# EAGLE board Final Thesis (EAGLE 7.5.0)
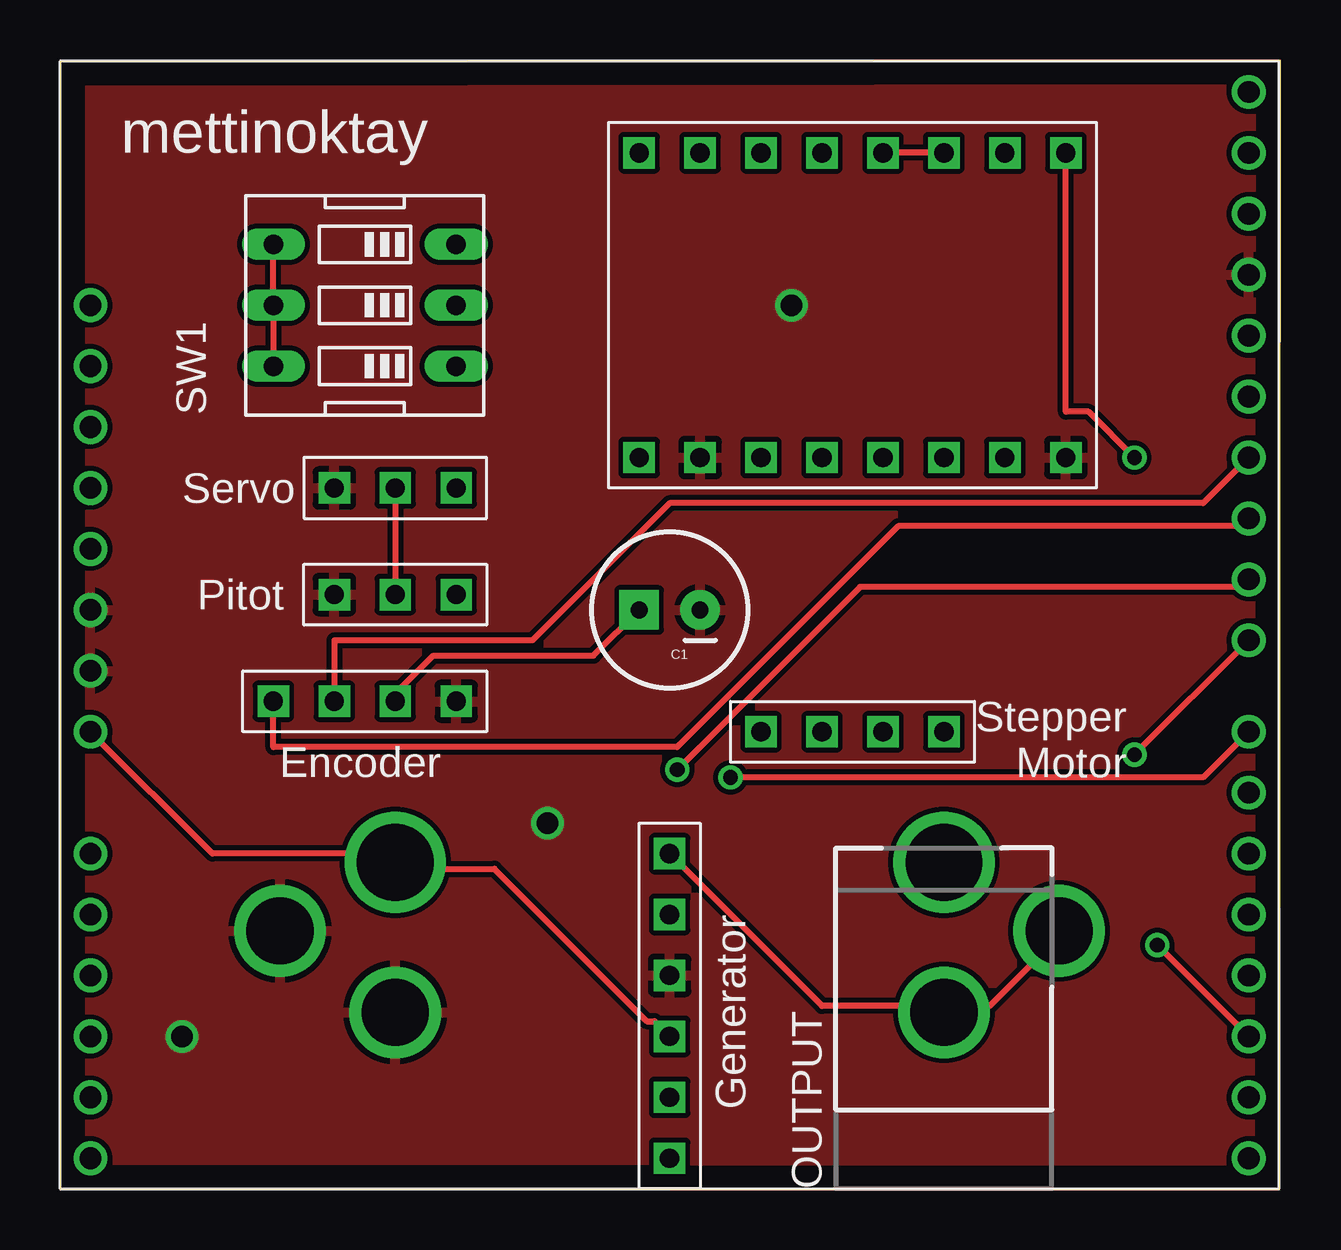
[diagram p0: board, top side]
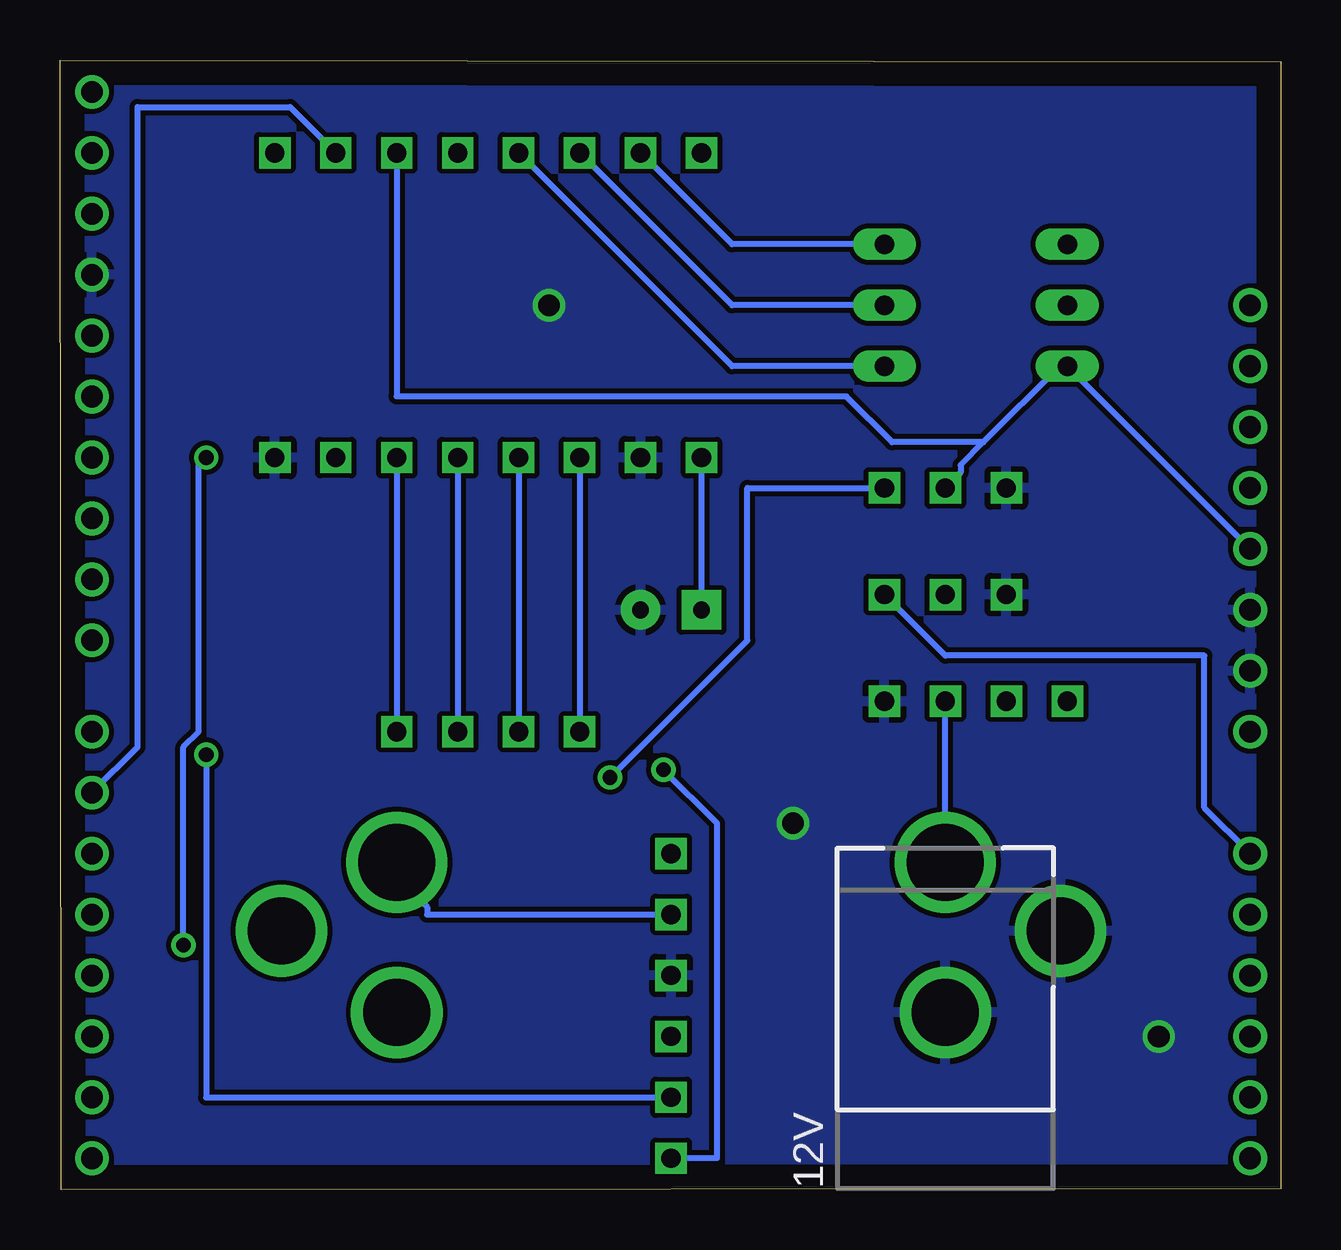
[diagram p1: board, bottom side, seen from below]

Size 50.86 x 47.09 mm. Coordinates in mm from the lower left corner, seen from the top.
Outline: 0,0.04 50.81,0 50.86,47.09 0,47.02 0,0.04
Copper layers (1*16): Top 0.035mm / dielectric 1.5mm / Bottom 0.035mm
Design rules "default": minimum track width 10mil, minimum drill 24mil, track to track 8mil, track to pad 8mil, pad to pad 8mil, via to via 8mil, smd to smd 8mil, copper to edge 40mil, drill to drill 8mil, minimum pad ring 10mil, minimum via ring 8mil, stop-mask expansion 4mil, vias tented up to drill 0mil, thermal gap 10mil

## Footprints (pad centres in the part's own frame; a part is rotated, then mirrored left to right if it is on the bottom)
DCJACK_2MM_PTH = drill 2.8: GND 0,7.35; GNDBREAK 4.8,10.75 | drill 3.2: PWR 0,13.6
CPOL-RADIAL-100UF-25V = drill 0.7 pad 1.651 square: 1 1.27,0 | drill 0.7 pad 1.651: 2 -1.27,0
ARCH_PRO = drill 0.9: 3V3 -17.78,17.78; 5V -17.78,15.24; GND1 -17.78,12.7; GND2 -17.78,10.16; GND3 30.48,26.67; IOREF -17.78,22.86; P0_0_SDA1_TXD3 30.48,11.43; P0_1_SCL1_RXD3 30.48,13.97; P0_4 30.48,-5.08; P0_5 30.48,-2.54; P0_6_SSEL 30.48,16.51; P0_7_SCK 30.48,24.13; P0_8_MISO 30.48,21.59; P0_9_MOSI 30.48,19.05; P0_23 -17.78,2.54; P0_24 -17.78,0; P0_25_TXD3 -17.78,-2.54; P0_26_RXD3 -17.78,-5.08; P0_27_SDA0 30.48,31.75; P0_28_SCL0 30.48,34.29; P1_30 -17.78,-7.62; P1_31 -17.78,-10.16; P2_12 -17.78,25.4; P2_13 30.48,29.21; P4_28_TXD3 30.48,-7.62; P4_29_RXD3 30.48,-10.16; RST -17.78,20.32; VIN -17.78,7.62; ~P2_2 30.48,0; ~P2_3 30.48,2.54; ~P2_4 30.48,5.08; ~P2_5 30.48,7.62
EDG-03 = drill 0.813 long: 1 -2.54,-3.81; 2 0,-3.81; 3 2.54,-3.81; 4 2.54,3.81; 5 0,3.81; 6 -2.54,3.81
ENCODER = drill 0.8 square: A 0,3.81; B 0,1.27; GND 0,-3.81; VCC 0,-1.27
GENERATOR = drill 0.8 square: + 0,-3.81; - 0,-6.35; A 0,6.35; B 0,3.81; GND 0,-1.27; VCC 0,1.27
PITOT = drill 0.8 square: 5V 0,-1.27; GND 0,-3.81; SGN 0,1.27
SERVO = drill 0.8 square: 5V 0,-1.27; GND 0,-3.81; SGN 0,1.27
STEPPER = drill 0.8 square: A 0,3.81; B 0,1.27; C 0,-1.27; D 0,-3.81
STEPPER_DRIVER = drill 0.8 square: A1 -6.35,-1.27; A2 -6.35,-3.81; B1 -6.35,1.27; B2 -6.35,3.81; DIR 6.35,-8.89; ENB 6.35,8.89; FLT -6.35,-6.35; GND -6.35,-8.89; GND1 -6.35,6.35; M0 6.35,6.35; M1 6.35,3.81; M2 6.35,1.27; RST 6.35,-1.27; SLP 6.35,-3.81; STEP 6.35,-6.35; VMOT -6.35,8.89

## Placement (x,y rotation side)
12V  [DCJACK_2MM_PTH]  13.97,0.04 0 bottom
C1  100uF  [CPOL-RADIAL-100UF-25V]  25.4,24.17 180 top
OUTPUT  [DCJACK_2MM_PTH]  36.83,0.04 0 top
SAP1  [ARCH_PRO]  19.05,11.47 0 top
SW1  [EDG-03]  12.7,36.87 90 top
U$1  ENCODER  [ENCODER]  12.7,20.36 90 top
U$2  GENERATOR  [GENERATOR]  25.4,7.66 180 top
U$3  PITOT  [PITOT]  15.24,24.81 270 top
U$4  SERVO  [SERVO]  15.24,29.25 270 top
U$5  STEPPER  [STEPPER]  33.02,19.09 90 top
U$6  STEPPER_DRIVER  [STEPPER_DRIVER]  33.02,36.87 90 top

## Library data of the parts
12V OUTPUT = adafruit
C1 = SparkFun-Capacitors
SAP1 U$1-U$6 = Final_Thesis
SW1 = special

## Nets
5V: SAP1.5V SW1.4 SW1.5 SW1.6 U$3.5V U$4.5V U$6.RST U$6.SLP
12V: 12V.PWR C1.1 SAP1.VIN U$1.VCC U$2.VCC U$6.VMOT
GND: 12V.GND 12V.GNDBREAK C1.2 SAP1.GND1 SAP1.GND2 SAP1.GND3 U$1.GND U$2.GND U$3.GND U$4.GND U$6.GND U$6.GND1
N$1: U$5.A U$6.B2
N$2: U$5.B U$6.B1
N$3: U$5.C U$6.A1
N$4: U$5.D U$6.A2
N$6: OUTPUT.PWR U$2.+
N$10: SW1.3 U$6.M0
N$12: SW1.2 U$6.M1
N$13: SW1.1 U$6.M2
N$15: OUTPUT.GND OUTPUT.GNDBREAK U$2.-
P0_0: SAP1.P0_0_SDA1_TXD3 U$2.B
P0_1: SAP1.P0_1_SCL1_RXD3 U$2.A
P0_4: SAP1.P0_4 U$6.DIR
P0_6: SAP1.P0_6_SSEL U$1.A
P0_9: SAP1.P0_9_MOSI U$1.B
P0_23: SAP1.P0_23 U$3.SGN
~P2_4: SAP1.~P2_4 U$6.STEP
~P2_5: SAP1.~P2_5 U$4.SGN

## Tracks (layer width: path | path; a pad name or v marks a point on that pad's centre or on a via)
5V
  Top 0.254: U$6.SLP U$6.RST | U$4.5V U$3.5V | SW1.6 SW1.5 SW1.4
  Bottom 0.254: U$6.SLP 36.83,33.06 18.1,33.06 16.19,31.16 12.38,31.16 | SAP1.5V SW1.6 9.21,34.33 12.38,31.16 | U$4.5V 13.34,29.89 13.34,30.2 12.38,31.16
12V
  Top 0.254: U$2.VCC 24.77,7.03 24.45,7.03 18.1,13.38 13.97,13.38 12V.PWR 13.97,13.69 13.65,14.01 6.35,14.01 SAP1.VIN | C1.1 22.23,22.27 15.56,22.27 13.97,20.68 U$1.VCC
  Bottom 0.254: C1.1 U$6.VMOT | 12V.PWR U$1.VCC
GND  (via drill 0.9)
  other vias: 30.48,36.87 20.32,15.28 5.08,6.39
  pour Top: -1.27,48.3 -1.27,-1.23 52.07,-1.23 52.07,48.3
  pour Bottom: -1.27,48.3 -1.27,-1.23 52.07,-1.23 52.07,48.3
N$1
  Bottom 0.254: U$6.B2 U$5.A
N$2
  Bottom 0.254: U$6.B1 U$5.B
N$3
  Bottom 0.254: U$6.A1 U$5.C
N$4
  Bottom 0.254: U$6.A2 U$5.D
N$6
  Bottom 0.254: U$2.+ 35.56,11.47 35.56,11.79 36.83,13.06 OUTPUT.PWR
N$10
  Bottom 0.254: U$6.M0 22.86,39.41 SW1.3
N$12
  Bottom 0.254: U$6.M1 22.86,36.87 SW1.2
N$13
  Bottom 0.254: U$6.M2 22.86,34.33 SW1.1
N$15
  Top 0.254: U$2.- 31.75,7.66 36.83,7.66 | 36.83,7.66 38.73,7.66 41.59,10.52 OUTPUT.GNDBREAK | 36.83,7.66 OUTPUT.GND
P0_0  (via drill 0.61)
  Top 0.254: SAP1.P0_0_SDA1_TXD3 v44.77,18.14
  Bottom 0.254: U$2.B 44.77,3.85 v44.77,18.14
P0_1  (via drill 0.61)
  Top 0.254: v25.72,17.5 33.34,25.12 49.21,25.12 SAP1.P0_1_SCL1_RXD3
  Bottom 0.254: U$2.A 23.49,1.31 23.49,15.28 v25.72,17.5
P0_4  (via drill 0.61)
  Top 0.254: U$6.DIR 41.91,32.43 42.86,32.43 v44.77,30.52 | SAP1.P0_4 v45.72,10.2
  Bottom 0.254: v44.77,30.52 45.08,30.2 45.08,19.09 45.72,18.46 v45.72,10.2
P0_6
  Top 0.254: U$1.A 8.89,18.46 25.72,18.46 34.92,27.66 49.21,27.66 SAP1.P0_6_SSEL
P0_9
  Top 0.254: U$1.B 11.43,22.9 19.69,22.9 25.4,28.62 47.62,28.62 SAP1.P0_9_MOSI
P0_23
  Bottom 0.254: U$3.SGN 13.97,22.27 3.17,22.27 3.17,15.92 SAP1.P0_23
~P2_4
  Bottom 0.254: U$6.STEP 41.28,45.13 47.62,45.13 47.62,18.46 SAP1.~P2_4
~P2_5  (via drill 0.61)
  Top 0.254: v27.94,17.19 47.62,17.19 SAP1.~P2_5
  Bottom 0.254: U$4.SGN 22.23,29.25 22.23,22.9 v27.94,17.19

## Text on the board
tNames: mettinoktay